# Altium PCB Schroff_MultipacPro_410.2x215.9mm.pcbdoc
Units mil, origin at the board's own origin, x right, y up, seen from the top; angles counter-clockwise.
Board outline 16150 x 8500 mil, 4 copper layers (Top Layer, L3_PWR, L2_GND, Bottom Layer), stack 62.205 mil thick; 3 components, 0 nets, 3 pads, 119 vias.
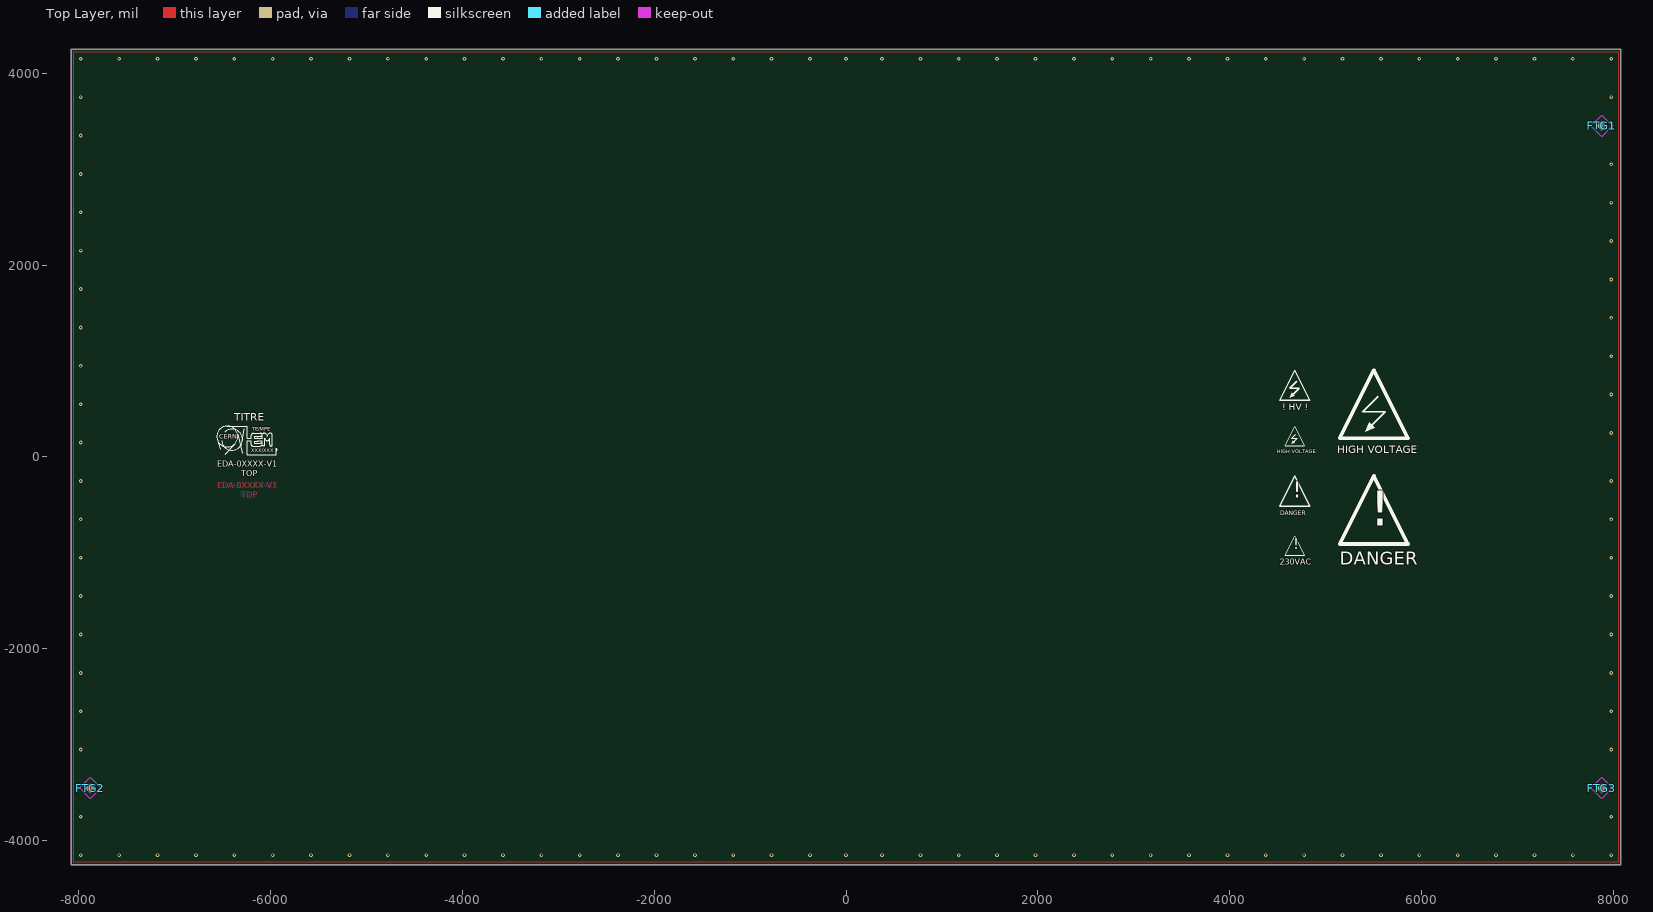
[diagram p0: Top Layer view]
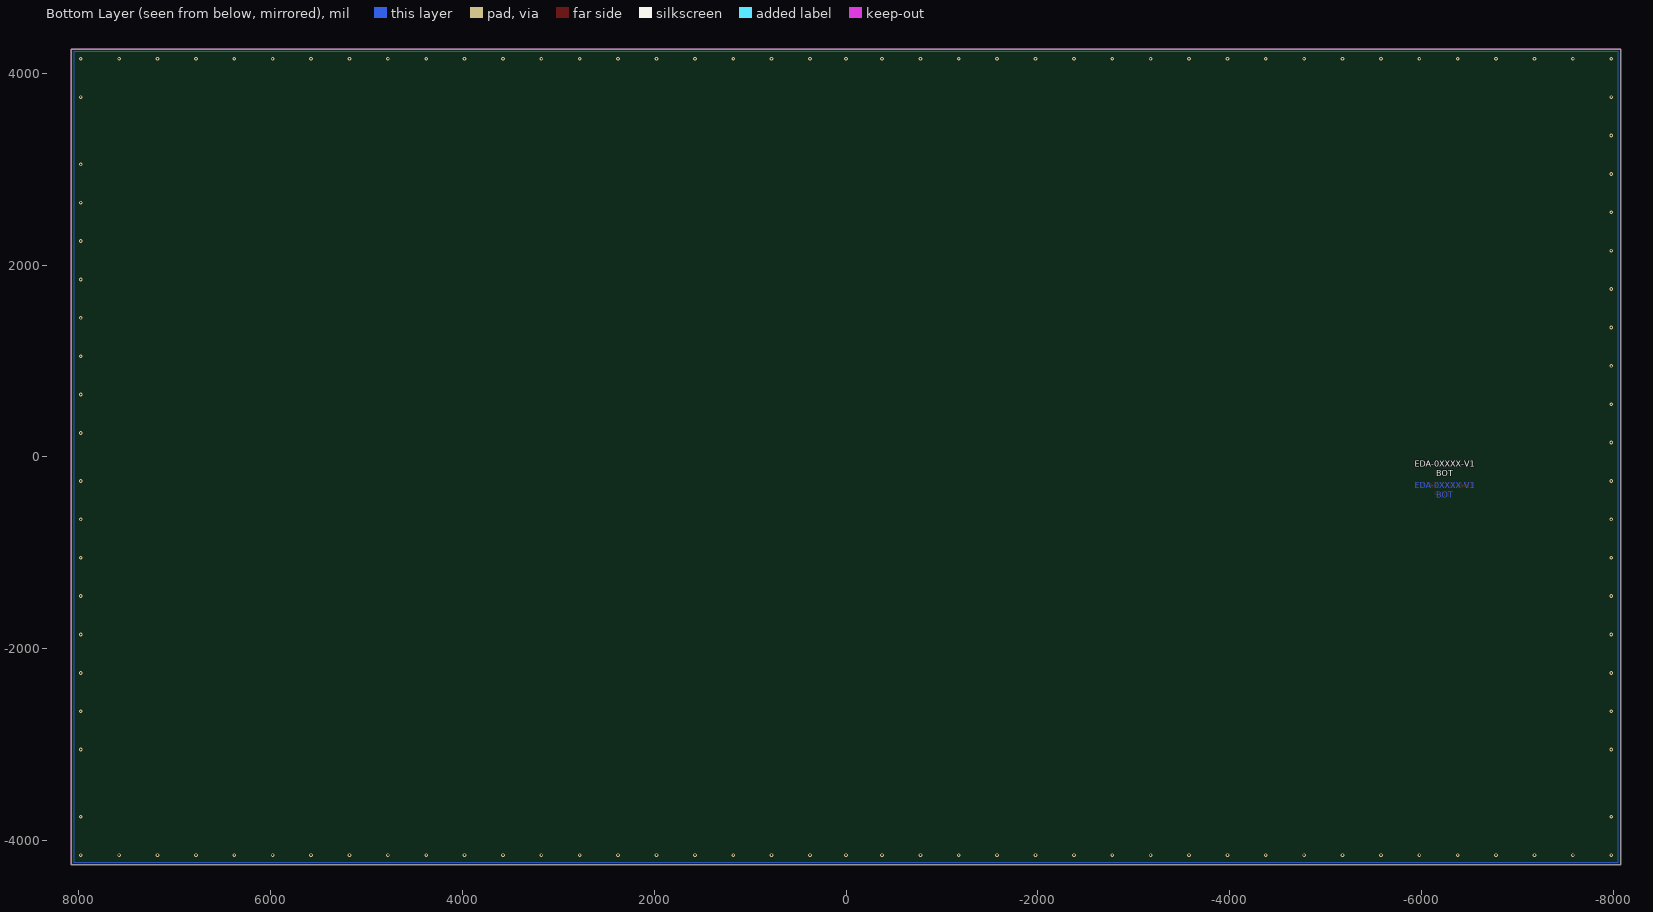
[diagram p1: Bottom Layer view, seen from below]
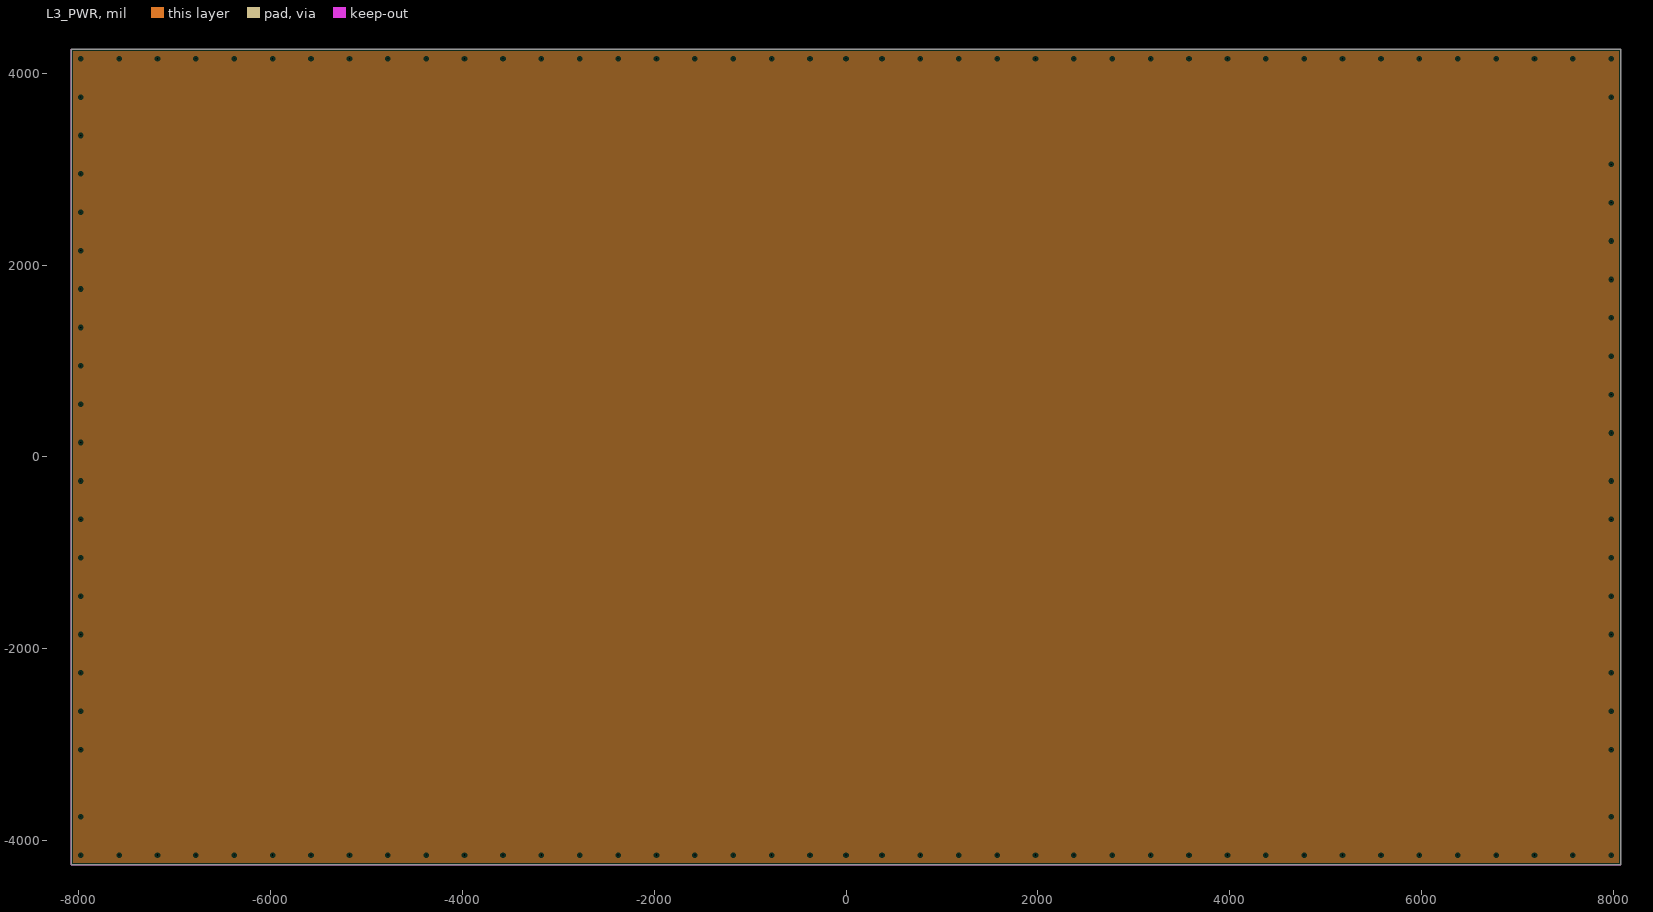
[diagram p2: L3_PWR, clearances drawn from the general rule]
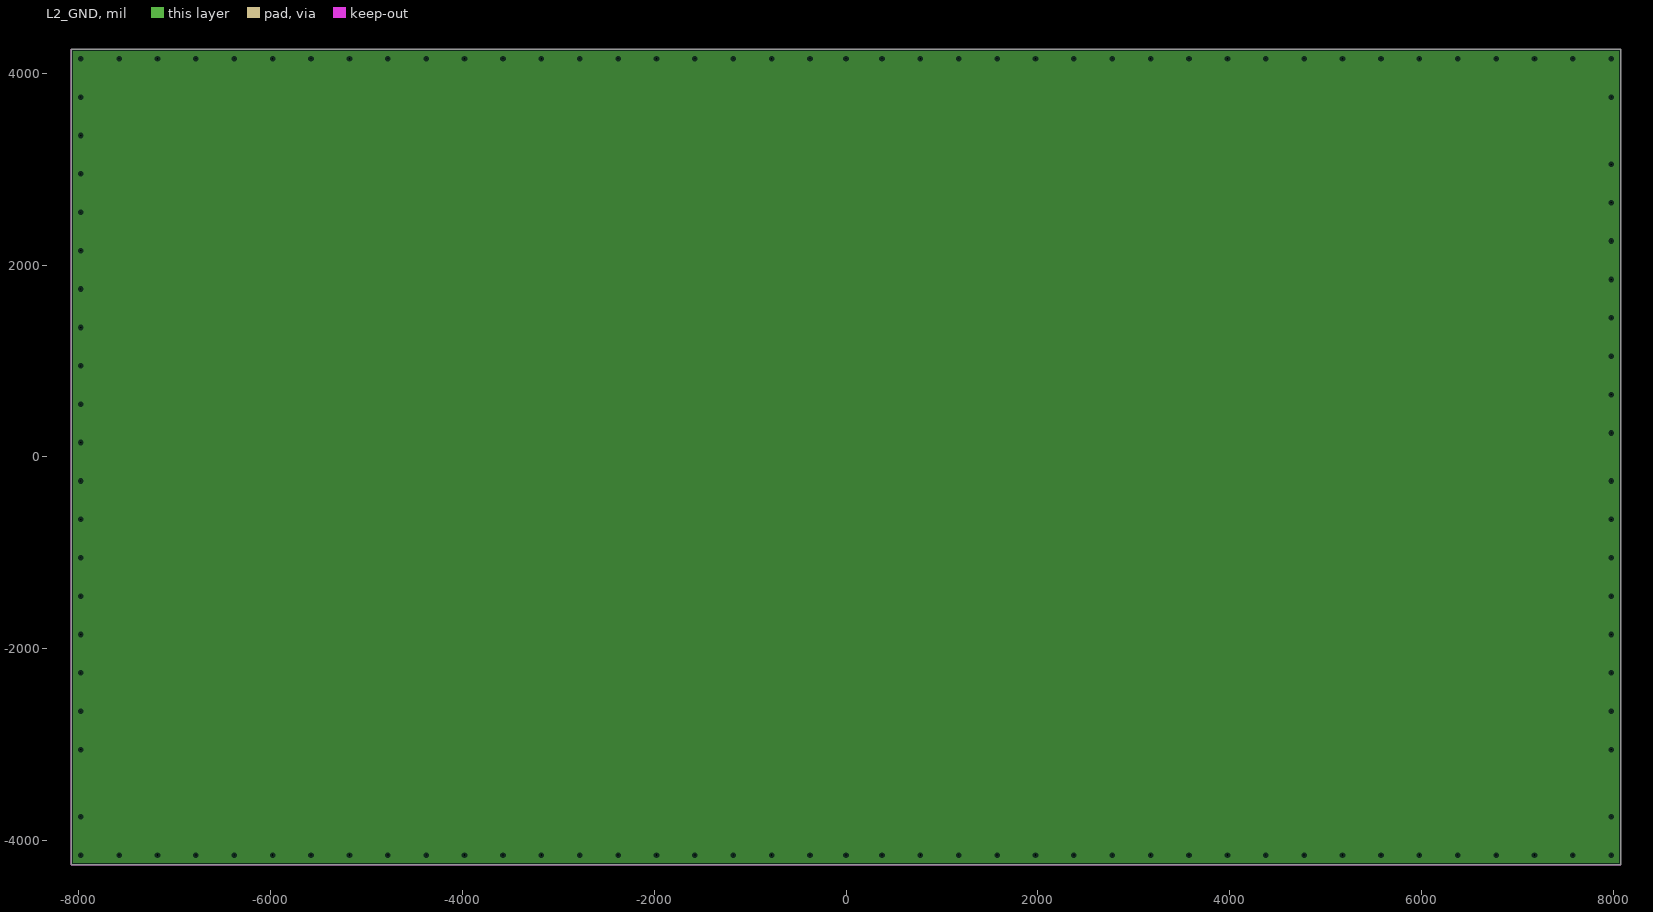
[diagram p3: L2_GND, clearances drawn from the general rule]

## Layer stack, top to bottom
Top Solder: solder mask 0.3937, Solder Resist, Dk 3.5
Top Layer: signal copper 1.378
Dielectric1: prepreg 8.6614, FR-4, Dk 4.2
L3_PWR: plane copper 1.378, net GND
Dielectric2: core 39.3701, FR-4, Dk 4.2
L2_GND: plane copper 1.378, net GND
Dielectric3: prepreg 8.6614, FR-4, Dk 4.2
Bottom Layer: signal copper 1.378
Bottom Solder: solder mask 0.3937, Solder Resist, Dk 3.5

## Board outline
-8075,-4250 8075,-4250 8075,4250 -8075,4250

## Design rules (kind name [scope] priority, off if disabled: settings)
Clearance Clearance_KeepOut [OnLayer('Keep-Out Layer') vs (InPadClass('DIN'))] p1: gap=3.94 ignorepadtopadclearanceinfootprint=FALSE except(0: Arc-Hole Track-Hole SMDPad-Hole THPad-Hole Via-Hole Fill-Hole Poly-Hole Region-Hole Text-Hole)
Clearance Clearance_Mires [OnLayer('Keep-Out Layer') vs HasFootprint('FIDUCIAL_TOP_S200-400')] p2: gap=0 ignorepadtopadclearanceinfootprint=FALSE except(133.86: Arc-SMDPad Track-SMDPad)
Clearance [All] p3: gap=12.2 ignorepadtopadclearanceinfootprint=FALSE except(0: Arc-Hole Track-Hole SMDPad-Hole THPad-Hole Via-Hole Fill-Hole Poly-Hole Region-Hole Text-Hole)
ComponentClearance ComponentClearance_Overlapping [InComponentClass('Overlapping') or InComponentClass('NotMounted') vs InComponentClass('Overlapping')] p1: gap=0 collisioncheckmode=3 verticalgap=0 showdistances=FALSE
ComponentClearance [not InComponentClass('Overlapping')] p2: gap=7.87 collisioncheckmode=3 verticalgap=7.87 showdistances=FALSE
DiffPairsRouting [All] p1: maxlimit=18 minlimit=18 mostfreqgap=18 toplayer_minwidth=9 toplayer_maxwidth=9 toplayer_prefwidth=9 bottomlayer_minwidth=9 bottomlayer_maxwidth=9 bottomlayer_prefwidth=9 maxuncoupledlength=100
FabricationTestPointUsage TestPointUsage [All] p1: valid=0 allowmultiple=FALSE
FabricationTestpoint Testpoint [All] p1: side=3 testpointundercomponent=TRUE minsize=40 maxsize=100 preferedsize=60 minholesize=0 maxholesize=40 preferedholesize=32.01 testpointgrid=0.98 allowsidetop=TRUE allowsidebottom=TRUE usegrid=TRUE gridtolerance=0.01
Height [All] p1: minheight=0 maxheight=984.25 prefheight=393.7
HoleSize [All] p1: absolutevalues=TRUE maxlimit=196.85 minlimit=19.68 maxpercent=80.000 minpercent=20.000
HoleToHoleClearance [All] p1: gap=7.87 allowstackedmicrovias=TRUE
MinimumSolderMaskSliver [All] p1: minsoldermaskwidth=13.78
PermittedLayers [All] p1: toplayerpermitted=TRUE bottomlayerpermitted=FALSE
PlaneClearance [All] p1: clearance=19.68
PlaneConnect PlaneConnect_Direct [InPadClass('Mounting') or IsVia] p1: planeconnectstyle=Direct reliefexpansion=20 reliefentries=4 reliefconductorwidth=10 reliefairgap=10
PlaneConnect "PlaneConnect_0 > 0.5" [AsMM(HoleDiameter)<0.5] p2: planeconnectstyle=Relief reliefexpansion=11.81 reliefentries=4 reliefconductorwidth=7.87 reliefairgap=7.87
PlaneConnect "PlaneConnect_0.5 > 1" [(AsMM(HoleDiameter)>=0.5) and (AsMM(HoleDiameter)<1)] p3: planeconnectstyle=Relief reliefexpansion=11.81 reliefentries=4 reliefconductorwidth=9.84 reliefairgap=7.87
PlaneConnect "PlaneConnect_1 > 1.5" [(AsMM(HoleDiameter)>=1) and (AsMM(HoleDiameter)<1.5)] p4: planeconnectstyle=Relief reliefexpansion=11.81 reliefentries=4 reliefconductorwidth=11.81 reliefairgap=7.87
PlaneConnect "PlaneConnect_1.5 > 2" [(AsMM(HoleDiameter)>=1.5) and (AsMM(HoleDiameter)<2)] p5: planeconnectstyle=Relief reliefexpansion=11.81 reliefentries=4 reliefconductorwidth=15.75 reliefairgap=7.87
PlaneConnect [All] p6: planeconnectstyle=Relief reliefexpansion=11.81 reliefentries=4 reliefconductorwidth=19.68 reliefairgap=7.87
PolygonConnect PolygonConnect_Direct [InPadClass('Mounting') or IsVia] p1: connectstyle=Direct reliefconductorwidth=10 reliefentries=4 polygonreliefangle="90 Angle" airgapwidth=10
PolygonConnect "PolygonConnect_0 > 0.5" [AsMM(HoleDiameter)<0.5] p2: connectstyle=Relief reliefconductorwidth=7.87 reliefentries=4 polygonreliefangle="90 Angle" airgapwidth=7.87
PolygonConnect "PolygonConnect_0.5 > 1" [(AsMM(HoleDiameter)>=0.5) and (AsMM(HoleDiameter)<1)] p3: connectstyle=Relief reliefconductorwidth=9.84 reliefentries=4 polygonreliefangle="90 Angle" airgapwidth=7.87
PolygonConnect "PolygonConnect_1 > 1.5" [(AsMM(HoleDiameter)>=1) and (AsMM(HoleDiameter)<1.5)] p4: connectstyle=Relief reliefconductorwidth=11.81 reliefentries=4 polygonreliefangle="90 Angle" airgapwidth=7.87
PolygonConnect "PolygonConnect_1.5 > 2" [(AsMM(HoleDiameter)>=1.5) and (AsMM(HoleDiameter)<2)] p5: connectstyle=Relief reliefconductorwidth=15.75 reliefentries=4 polygonreliefangle="90 Angle" airgapwidth=7.87
PolygonConnect [All] p6: connectstyle=Relief reliefconductorwidth=19.68 reliefentries=4 polygonreliefangle="90 Angle" airgapwidth=7.87
RoomDefinition EDA-0xxxx-Vx-x_sch [InComponentClass('EDA-0xxxx-Vx-x_sch')] p1: confinementstyle=ConfineIn formatcopy=TRUE lockcomponents=FALSE outline -8065.55,-4218.51 -1375,-4218.51 -1375,-281.49 -8065.55,-281.49
RoutingVias RoutingVias_NoNet [Not IsElectrical] p1: holewidth=0 width=0 viastyle="Through Hole" minholewidth=0 minwidth=0 maxholewidth=0 maxwidth=0
RoutingVias [All] p2: holewidth=19.68 width=39.37 viastyle="Through Hole" minholewidth=19.68 minwidth=39.37 maxholewidth=19.68 maxwidth=39.37
SilkToSilkClearance [All] p1: silktosilkclearance=7.87
SilkToSolderMaskClearance SilkToSolderMaskClearanceVias [IsVia vs IsText] p1: minsilkscreentomaskgap=0.01 clearancetoexposedcopper=TRUE
SilkToSolderMaskClearance SilkscreenOverComponentPads [IsPad] p2: minsilkscreentomaskgap=8.86 clearancetoexposedcopper=TRUE
SolderMaskExpansion [All] p1: expansion=0
ViasUnderSMD [All] p1: allowed=FALSE
Width [All] p1: maxlimit=100 minlimit=12 preferedwidth=12
18 further rules are at their usual default settings.

## Classes and differential pairs
pad class DIN: J1-MTG1 J1-MTG2

## Components (designator, comment, footprint, x,y, rotation, side; value= is the part's Value field where it differs from the comment)
FTG1 "Use only in PCB" FIDUCIAL_TOP_S200-400 7875,3450 r0 top
FTG2 "Use only in PCB" FIDUCIAL_TOP_S200-400 -7875,-3450 r0 top
FTG3 "Use only in PCB" FIDUCIAL_TOP_S200-400 7875,-3450 r0 top

## Footprints (in the part's own frame and the unit in brackets; to place one, negate y for a bottom-side part, rotate by r counter-clockwise, add the part's x,y. Pads: shape width x height; smd on the part's side, far side on the other; paste and mask are expansions set on the pad)
FIDUCIAL_TOP_S200-400 [mm] "Square Fiducial Target, Top Layer, 2.0mm, Top Solder 4.0mm, Keepout =4.0mm"
  rect 2x2 smd rot 45 paste-0.9 mask+1: 1(0,0)
  Top Layer keep-out region: -2.839,0.011 -0.011,2.839 2.818,0.011 -0.011,-2.818

## Part data
FTG1 FTG2 FTG3: library part FIDUCIAL_TARGET_S200-400, "Fiducial Target", Author="CERN DEM JLC", classname=NotMounted, ComponentHeight=0mm, Component Type="Standard (No BOM)", CreateDate=02/06/2008, Family=Fiducial, HelpURL=Undefined, LatestRevisionDate=04/04/2012, Mounted=No, PackageDescription="Square Fiducial Target, Top Layer, 2.0mm, Top Solder 4.0mm, Keepout =4.0mm", Part Description="Square Fiducial Target, Top Layer, 2.0mm, Top Solder 4.0mm, Keepout =4.0mm", Part Number=FIDUCIAL_TARGET_S200-400, Pin Count=1, Sense=No, SMD=Yes, Socket=No, Status=None

## Via types
v1: diameter 39.37, hole 19.68, Top Layer to Bottom Layer, tented both sides, 119 vias

## Nets (pads, with @x,y where several pads share a name; then routed paths per layer and width w, separated by ;. In a path a pad name is that pad's centre, name@x,y a point inside that pad or via, vN(x,y) a via of type N, cw(c..) or ccw(c..) an arc to the next point about the centre after c; other vN are vias at no path point)
pads on no net: FTG1.1 FTG2.1 FTG3.1
copper on no net:
  other v1: -7975,-4150 -7575,-4150 -7175,-4150 -6775,-4150 -6375,-4150 -5975,-4150 -5575,-4150 -5175,-4150 -4775,-4150 -4375,-4150 -3975,-4150 -3575,-4150 -3175,-4150 -2775,-4150 -2375,-4150 -1975,-4150 -1575,-4150 -1175,-4150 -775,-4150 -375,-4150 0,-4150 375,-4150 775,-4150 1175,-4150 1575,-4150 1975,-4150 2375,-4150 2775,-4150 3175,-4150 3575,-4150 3975,-4150 4375,-4150 4775,-4150 5175,-4150 5575,-4150 5975,-4150 6375,-4150 6775,-4150 7175,-4150 7575,-4150 7975,-4150 -7975,-3750 7975,-3750 -7975,-3050 7975,-3050 -7975,-2650 7975,-2650 -7975,-2250 7975,-2250 -7975,-1850 7975,-1850 -7975,-1450 7975,-1450 -7975,-1050 7975,-1050 -7975,-650 7975,-650 -7975,-250 7975,-250 -7975,150 7975,250 -7975,550 7975,650 -7975,950 7975,1050 -7975,1350 7975,1450 -7975,1750 7975,1850 -7975,2150 7975,2250 -7975,2550 7975,2650 -7975,2950 7975,3050 -7975,3350 -7975,3750 7975,3750 -7975,4150 -7575,4150 -7175,4150 -6775,4150 -6375,4150 -5975,4150 -5575,4150 -5175,4150 -4775,4150 -4375,4150 -3975,4150 -3575,4150 -3175,4150 -2775,4150 -2375,4150 -1975,4150 -1575,4150 -1175,4150 -775,4150 -375,4150 0,4150 375,4150 775,4150 1175,4150 1575,4150 1975,4150 2375,4150 2775,4150 3175,4150 3575,4150 3975,4150 4375,4150 4775,4150 5175,4150 5575,4150 5975,4150 6375,4150 6775,4150 7175,4150 7575,4150 7975,4150

## Polygon pours and split planes (outlines as drawn)
no net on Top Layer "NONET_L01_P006" (solid, remove dead copper, pour order 6): -8050,-4225 -8050,4225 8050,4225 8050,-4225
no net on Bottom Layer "NONET_L04_P008" (solid, remove dead copper, pour order 8): -8050,-4225 -8050,4225 8050,4225 8050,-4225
no net on L3_PWR (split plane): 8055.22,-4230.22 -8055.22,-4230.22 -8055.22,4230.22 8055.22,4230.22
no net on L2_GND (split plane): 8055.22,-4230.22 -8055.22,-4230.22 -8055.22,4230.22 8055.22,4230.22

## Keep-outs
Keep-Out Layer:
  the board outline again, w7.87

## Other copper
Top Layer:
  text "EDA-0XXXX-V1" at -6550,-325 h59.06
  text "TOP" at -6300,-425 h59.06
  text ".Layer_Name" at -5275,-5225 h75 r45
  text "1" at -5237.5,-5400 h100
Bottom Layer:
  text "EDA-0XXXX-V1" at -5925,-325 h59.06
  text "BOT" at -6150,-425 h59.06
  text ".Layer_Name" at -4200,-4750 h75 r45
  text "4" at -4662.5,-5400 h100
L2_GND (plane layer: these items are gaps in the copper):
  rectangle: -4925,-5450 -4525,-5250
  rectangle: -5325,-5450 -5125,-5250
  text ".Layer_Name" at -5075,-5225 h75 r45
  text "2" at -5050,-5400 h100
L3_PWR (plane layer: these items are gaps in the copper):
  rectangle: -4725,-5450 -4525,-5250
  rectangle: -5325,-5450 -4925,-5250
  text ".Layer_Name" at -4600,-4950 h75 r45
  text "3" at -4862.5,-5400 h100

## Silkscreen, mask and mechanical layers (free items; w line width, h text height)
Top Overlay:
  circle w8: c-6446.67,213.39 r109.26
  circle w11.81: c-5937.5,76.18 r7.87
  region: 5413.58,265.16 5452.95,363.58 5512.01,304.53
  region: 4626.18,619.49 4645.87,668.7 4675.39,639.17
  region: 4645.87,137.2 4655.71,166.73 4675.39,147.05
  lines w7.87: -6199,129.52 -6199,168.9 ; -6199,192.52 -6199,227.95 ; 4665.55,156.89 4704.92,196.26 4645.87,196.26 4685.24,235.63 ; 4576.97,-1024.21 4675.39,-827.36 4773.82,-1024.21 4576.97,-1024.21 ; 4576.97,117.52 4773.82,117.52 4675.39,314.37 4576.97,117.52
  lines w7.99: -6506.89,169.99 ccw(c-6398.22,180.57) -6476.25,256.94
  lines w8: -6551.89,184 -6523.61,82.77 ; -6468.48,27.36 -6365.96,139.79 ; -6446.67,322.64 -6237.5,322.64 -6237.5,192.52 -6199,192.52 ; -6340.31,238.24 -6293.31,37.01 ; -6290.13,165.16 -6271.53,295.59 ; -6237.5,168.9 -6237.5,25 -5937.5,25 -5937.5,76.18 ; -6236.98,168.9 -6199,168.9 ; -6199,129.52 ccw(c-6179.32,133.96) -6179.32,113.78 -6104.52,113.78 ccw(c-6107.18,140.52) -6084.84,125.57 ; -6199,227.95 cw(c-6166.2,214.83) -6179.32,247.64 -6104.52,247.64 cw(c-6104.52,225.33) -6084.84,235.84 cw(c-6063.18,221.39) -6041.53,235.83 ; -6104.49,145.27 cw(c-6105.29,114.81) -6084.81,137.38 ; -6104.52,145.28 -6163.57,145.28 -6163.57,164.96 -6136.01,164.96 ccw(c-6134.7,172.18) -6128.14,168.89 -6084.83,168.9 -6084.83,137.4 ; -6084.83,125.59 ccw(c-6071.38,129.86) -6057.27,129.54 -6057.27,196.46 -6045.46,176.77 ccw(c-6031.68,182.28) -6017.9,176.77 -6006.09,196.46 -6006.09,129.53 ; -6041.52,235.83 -6031.68,216.14 -6021.84,235.83 ; -6021.85,235.82 cw(c-6000.19,223.76) -5978.53,235.82 ; -6006.09,129.52 ccw(c-5992.31,127.56) -5978.53,129.52 ; -5978.53,129.53 -5978.53,235.83 ; -6163.57,196.46 -6136.01,196.46 cw(c-6134.7,189.24) -6128.14,192.52 -6084.83,192.52 -6084.83,224.02 cw(c-6104.52,244.68) -6104.52,216.14 -6163.57,216.14 -6163.57,196.46
  lines w13.78: 4645.87,639.17 4724.61,717.91 4626.18,717.91 4695.08,786.81 ; 4517.91,-512.4 4675.39,-197.44 4832.87,-512.4 4517.91,-512.4 ; 4517.91,589.96 4832.87,589.96 4675.39,904.92 4517.91,589.96
  lines w19.68: 5462.8,314.37 5620.28,471.85 5384.06,471.85 5541.54,629.33
  lines w39.37: 5147.83,-906.1 5502.17,-197.44 5856.5,-906.1 5147.83,-906.1 ; 5147.83,196.26 5502.17,904.92 5856.5,196.26 5147.83,196.26
  text "! HV !" at 4547.44,462.01 h118.11
  text "TITRE" at -6375,375 h78.74
  text "TE/MPE" at -6187.5,275 h39.37
  text "CERN" at -6530,190 h49.21
  text "XXX/XXX" at -6200,50 h39.37
  text "HIGH VOLTAGE" at 4488.39,38.78 h39.37
  text "HIGH VOLTAGE" at 5118.31,38.78 h78.74
  text "EDA-0XXXX-V1" at -6550,-100 h59.06
  text "TOP" at -6300,-200 h59.06
  text "!" at 4655.71,-476.97 h295.28
  text "DANGER" at 4527.76,-620.67 h78.74
  text "!" at 5450.98,-847.05 h708.66
  text "!" at 4663.58,-1004.53 h196.85
  text "230VAC" at 4517.91,-1122.64 h59.06
  text "DANGER" at 5147.83,-1122.64 h137.8
  text ".Layer_Name" at -3975,-4850 h75
Bottom Overlay:
  text "EDA-0XXXX-V1" at -5925,-100 h59.06
  text "BOT" at -6150,-200 h59.06
  text ".Layer_Name" at -2375,-4850 h75
Top Paste:
  text ".Layer_Name" at -3975,-5050 h75
Bottom Paste:
  text ".Layer_Name" at -2375,-5050 h75
Top Solder:
  text ".Layer_Name" at -3975,-4950 h75
Bottom Solder:
  rectangle: -8075,-4250 -7925,4250
  rectangle: 7925,-4250 8075,4250
  text ".Layer_Name" at -2375,-4950 h75
Mechanical 1:
  the board outline again, w50
Mechanical 2:
  text "Components" at -1975,-4850 h75
  text ".Component_Count" at -1275,-4850 h75
  text "Pins" at -1975,-4950 h75
  text ".Pad_Count" at -1275,-4950 h75
  text "Vias" at -1975,-5050 h75
  text ".Via_Count" at -1275,-5050 h75
  text "Holes" at -1975,-5150 h75
  text ".Hole_Count" at -1275,-5150 h75
  text "Nets" at -1975,-5250 h75
  text ".Net_Count" at -1275,-5250 h75
Corners:
  lines w7.87: -8275,-4250 -8075,-4250 -8075,-4450 ; -8275,4250 -8075,4250 -8075,4450 ; 8075,-4450 8075,-4250 8275,-4250 ; 8075,4450 8075,4250 8275,4250
  lines w10: -5125,-5450 -5125,-5250 ; -4925,-5450 -4925,-5250 ; -4725,-5450 -4725,-5250 ; -5325,-5450 -5325,-5250 -4525,-5250 -4525,-5450 -5325,-5450
Title Block:
  circle w12: c-7900,-4950 r150
  lines w10: -7975,-4999.69 ccw(c-7800,-5000) -7946.93,-4904.94 ; -7625,-5000 -7625,-4825 ; -7525,-5125 -5875,-5125 ; -7525,-5000 -5875,-5000 ; -7525,-4875 -5875,-4875 ; -6975,-5250 -6975,-4750 ; -8075,-5250 -7575,-5250 -7575,-4750 -8075,-4750 -8075,-5250 ; -7525,-5250 -5875,-5250 -5875,-4750 -7525,-4750 -7525,-5250
  lines w12: -8040,-5004 -8000,-5125 ; -7920,-5245 -7799,-5061 ; -7900,-4800 -7600,-4775 ; -7753,-4920 -7650,-5250
  text "Number" at -7475,-4850 h75
  text "EDA-0XXXX-VX" at -6925,-4850 h75
  text "Drawn By" at -7475,-4975 h75
  text "XXX" at -6925,-4975 h75
  text "CERN" at -8025,-4985 h100
  text "DATE" at -7475,-5100 h75
  text "XX/XX/XXXX" at -6925,-5100 h75
  text "MOD." at -7475,-5225 h75
  text "-" at -6925,-5225 h75
  text "Print Date" at -7475,-5350 h50
  text ".Print_Date" at -6875,-5350 h50
  text ".Print_Time" at -6375,-5350 h50
  text ".Print_Scale" at -7475,-5450 h50
Notvisible:
  circle w5: c0,0 r19.69
  lines w5: -8075,-4250 0,0 ; -8075,0 0,0 ; -8075,4250 0,0 ; 0,-4250 0,0 ; 0,4250 0,0 ; 8075,-4250 0,0 ; 8075,0 0,0 ; 8075,4250 0,0
Drill Drawing:
  circle w9.84: c-7496.16,4982.81 r32.81
  lines w13.78: -7587.82,4905.71 -4609.01,4905.71 ; -7587.82,5053.35 -4609.01,5053.35 ; -7093.15,4758.07 -7093.15,5200.98 ; -6519.29,4758.07 -6519.29,5200.98 ; -5527.41,4758.07 -5527.41,5200.98 ; -5136.75,4758.07 -5136.75,5200.98 ; -7587.82,4758.07 -4609.01,4758.07 -4609.01,5200.98 -7587.82,5200.98 -7587.82,4758.07
  text "Symbol" at -7499.24,5097.64 h70.87
  text "Hit Count" at -7048.86,5097.64 h70.87
  text "Finished Hole Size" at -6475,5097.64 h70.87
  text "Plated" at -5483.12,5097.64 h70.87
  text "Via/Pad" at -5092.46,5097.64 h70.87
  text "119" at -7048.86,4950 h59.06
  text "0.50mm (19.69mil)" at -6475,4950 h59.06
  text "PTH" at -5483.12,4950 h59.06
  text "Via" at -5092.46,4950 h59.06
  text "119 Total" at -7048.86,4802.36 h59.06

## Dimensions
-8075,-4250 to -7825,-4000 on Drill Drawing
-8075,-4250 to -7825,-4000 on Drill Drawing
8275,-4250 to 8275,4250 on Mechanical 2
-8075,4250 to 8075,4250 on Mechanical 2